# EAGLE board rj45-adaptor-1-4 (EAGLE 8.4.3)
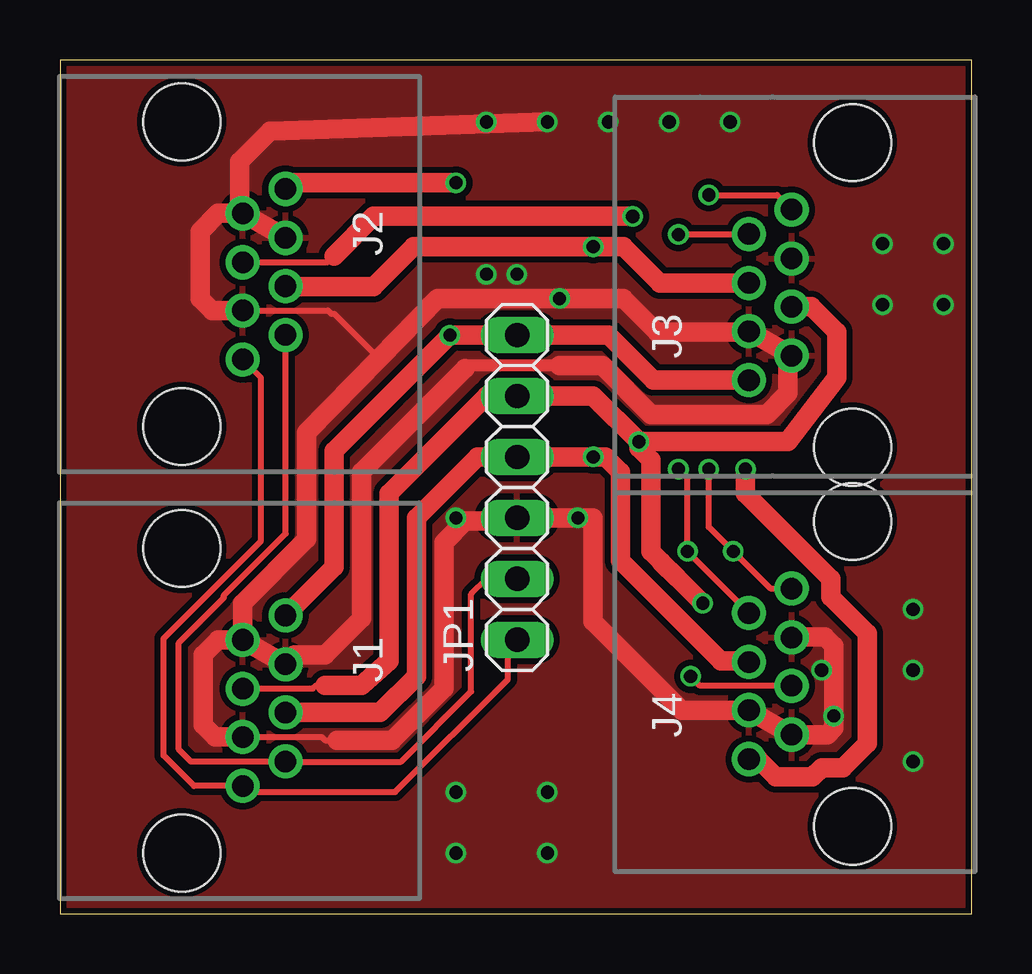
[diagram p0: board, top side]
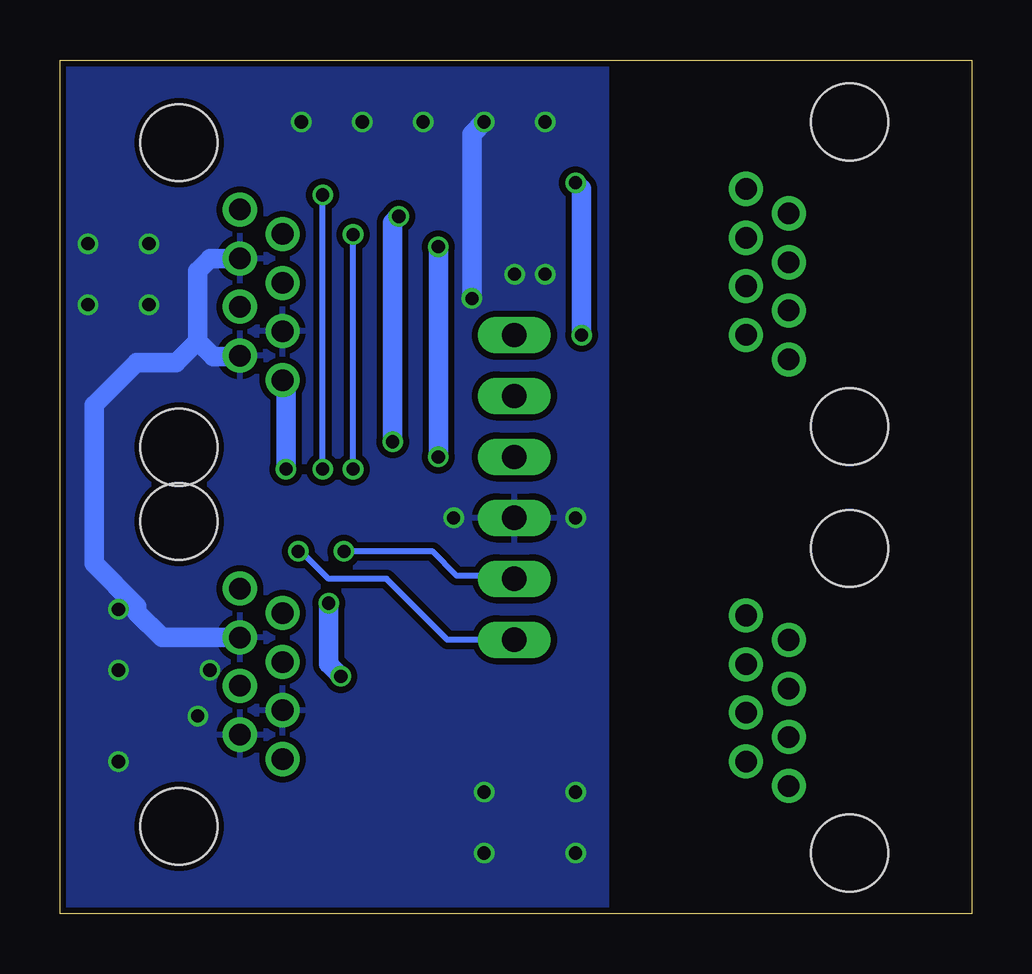
[diagram p1: board, bottom side, seen from below]

Size 38 x 35.6 mm. Coordinates in mm from the lower left corner, seen from the top.
Outline: 0,0 38,0 38,35.6 0,35.6 0,0
Copper layers (1*16): Top 0.035mm / dielectric 1.5mm / Bottom 0.035mm
Design rules "SeeedStudio_2layer_DRU_no_angle_20140221 *": minimum track width 6mil, minimum drill 12mil, track to track 10mil, track to pad 10mil, pad to pad 10mil, via to via 10mil, smd to smd 0mil, copper to edge 10mil, drill to drill 10mil, minimum pad ring 10mil, minimum via ring 6mil, stop-mask expansion 2mil, vias tented up to drill 100mil, thermal gap 10mil

## Footprints (pad centres in the part's own frame; a part is rotated, then mirrored left to right if it is on the bottom)
RJ45-PULSE-E5J88 = drill 0.9 pad 1.422: 1 3.555,2.54; 2 2.535,4.32; 3 1.515,2.54; 4 0.495,4.32; 5 -0.495,2.54; 6 -1.515,4.32; 7 -2.535,2.54; 8 -3.555,4.32 | hole 3.2: 6.35,0; -6.35,0
1X06 = drill 1.016 long: 1 -6.35,0; 2 -3.81,0; 3 -1.27,0; 4 1.27,0; 5 3.81,0; 6 6.35,0

## Placement (x,y rotation side)
J1  RJ45-JACK  [RJ45-PULSE-E5J88]  5.08,8.89 270 top
J2  RJ45-JACK  [RJ45-PULSE-E5J88]  5.08,26.67 270 top
J3  RJ45-JACK  [RJ45-PULSE-E5J88]  33.04,25.81 90 top
J4  RJ45-JACK  [RJ45-PULSE-E5J88]  33.04,10.01 90 top
JP1  [1X06]  19.06,17.78 90 top

## Library data of the parts
J1-J4 = trainlib
JP1 = pinhead

## Nets
ALT1: J1.4 J2.4 J3.4 J4.4 JP1.4
ALT2: J1.5 J2.5 J3.5 J4.5 JP1.5
CANH: J1.1 J2.1 J3.1 J4.1 JP1.1
CANL: J1.2 J2.2 J3.2 J4.2 JP1.2
GND: J1.3 J1.6 J1.7 J2.3 J2.6 J2.7 J3.3 J3.6 J3.7 J4.3 J4.6 J4.7 JP1.3
PWR_POS: J1.8 J2.8 J3.8 J4.8 JP1.6

## Tracks (layer width: path | path; a pad name or v marks a point on that pad's centre or on a via)
ALT1  (via drill 0.55)
  Top 0.813: J4.4 28.68,10.54 27.56,10.54 23.37,14.73 23.37,18.41 22.73,19.05 v22.23,19.05 JP1.4 17.4,19.05 14.86,16.51 14.86,9.91 13.35,8.39 J1.4 | J2.4 9.41,26.16 13.08,26.16 14.73,27.81 v22.23,27.81 23.5,27.81 25,26.3 J3.4
  Bottom 0.813: v22.23,19.05 v22.23,27.81
ALT2  (via drill 0.55)
  Top 0.254: J4.5 29.13,9.51 | 29.13,9.51 | J1.5 7.63,9.4 10.54,9.4 10.67,9.53 11.05,9.53 | J2.5 7.63,27.18 11.18,27.18 11.43,27.43 11.56,27.56 | 29.13,9.51 26.68,9.51 v26.29,9.91
  Top 0.813: 11.05,9.53 12.57,9.53 13.72,10.54 13.72,17.53 17.78,21.59 JP1.5 22.23,21.59 v24.13,19.68 | v24.13,19.68 30.35,19.68 32.38,22.35 32.38,24.26 31.33,25.31 J3.5 | v23.88,29.08 13.08,29.08 11.43,27.43 | v24.13,19.68 24.13,19.43 24.64,18.92 24.64,15.11 25.07,14.68 25.07,14.66 25.71,14.03 25.73,14.03 v26.8,12.95
  Bottom 0.813: v23.88,29.08 24.13,28.83 v24.13,19.68 | v26.8,12.95 26.8,10.41 v26.29,9.91
CANH  (via drill 0.55)
  Top 0.254: J4.1 29.61,13.57 v28.07,15.11 27.05,16.13 v27.05,18.54 | JP1.1 18.67,11.43 18.67,9.78 13.97,5.08 7.88,5.08 J1.1 5.59,5.33 4.32,6.6 4.32,11.48 8.38,15.55 8.38,22.35 J2.1 | v27.05,29.97 29.89,29.97 J3.1
  Bottom 0.254: JP1.1 21.84,11.43 24.38,13.97 26.8,13.97 27.94,15.11 v28.07,15.11 | v27.05,18.54 v27.05,29.97
CANL  (via drill 0.55)
  Top 0.254: JP1.2 17.78,13.97 17.14,13.34 17.14,9.27 14.22,6.35 J1.2 5.46,6.35 4.95,6.86 4.95,11.3 6.83,13.18 6.83,13.28 9.41,15.86 9.41,24 J2.2 | J4.2 28.72,12.55 v26.16,15.11 26.16,18.16 v25.78,18.54 | v25.78,28.32 25.8,28.34 J3.2
  Bottom 0.254: JP1.2 19.18,14.1 21.46,14.1 22.48,15.11 v26.16,15.11 | v25.78,18.54 v25.78,28.32
GND  (via drill 0.55)
  Top 0.254: J1.3 10.91,7.38 11.05,7.24 11.56,7.24 | J2.3 11.17,25.16 11.3,25.02 11.43,25.02 13.3,23.15
  Top 0.508: 20.83,22.86 17.02,22.86 16.89,22.73
  Top 0.813: J4.3 30.53,11.56 31.88,11.56 32.26,11.18 32.26,7.75 31.98,7.47 J4.7 J4.6 25.92,8.49 22.23,12.19 22.23,16.51 JP1.3 18.93,16.38 16.89,16.38 16,15.49 16,9.4 13.84,7.24 11.56,7.24 | J1.7 J1.6 9.79,10.79 11.05,10.79 12.57,12.32 12.57,18.41 16.89,22.73 | J2.6 J2.7 | J2.3 7.61,25.15 6.35,25.15 5.84,25.65 5.84,28.45 6.6,29.2 J2.7 | J1.7 6.6,11.43 5.97,10.79 5.97,7.87 6.47,7.38 J1.3 | J1.7 7.62,12.95 10.29,15.62 10.29,20.07 13.3,23.15 15.75,25.65 v20.83,25.65 23.5,25.65 24.89,24.26 28.68,24.26 J3.6 J3.7 30.35,23.13 30.35,21.72 29.46,20.83 24.64,20.83 22.61,22.86 20.83,22.86 | J2.7 7.49,29.33 7.49,31.37 8.76,32.64 v20.32,33.02
  Bottom 0.813: J3.7 30.53,23.24 31.62,23.24 32.26,23.88 | 32.26,23.88 32.26,26.8 31.73,27.32 J3.3 | v20.32,33.02 20.83,32.51 v20.83,25.65 | J4.3 33.75,11.52 34.8,12.57 34.8,12.83 36.58,14.61 36.58,21.21 34.8,22.99 33.15,22.99 32.26,23.88
  other vias: 17.78,33.02 22.86,33.02 25.4,33.02 27.94,33.02 34.29,27.94 36.83,27.94 34.29,25.4 36.83,25.4 17.78,26.67 19.05,26.67 21.59,16.51 16.51,16.51 16.51,5.08 16.51,2.54 20.32,2.54 20.32,5.08 31.75,10.16 32.26,8.26 35.56,10.16 35.56,6.35 35.56,12.7
  pour Top: 0,35.56 37.97,35.56 37.97,0 0,0
  pour Bottom: 37.97,35.56 15.24,35.56 15.24,0 37.97,0
PWR_POS  (via drill 0.55)
  Top 0.813: J1.8 11.43,14.47 11.43,19.3 v16.26,24.13 JP1.6 22.86,24.13 24.74,22.25 J3.8 | J2.8 9.65,30.48 v16.51,30.48 | J4.8 29.11,6.45 29.84,5.71 31.37,5.71 31.75,6.1 32.64,6.1 33.66,7.11 33.66,11.68 32.13,13.21 32.13,13.97 28.57,17.53 v28.57,18.54
  Bottom 0.813: v16.51,30.48 16.26,30.23 v16.26,24.13 | v28.57,18.54 28.57,22.11 J3.8